# Altium PCB PowerSupplyV2.PcbDoc (part 3 of 4)
Units mm, origin at the board's own origin, x right, y up, seen from the top; angles counter-clockwise.
Board outline 28.17 x 37.01 mm, 2 copper layers (Top Layer, Bottom Layer), stack 0.971 mm thick; 117 components, 81 nets, 421 pads, 118 vias.
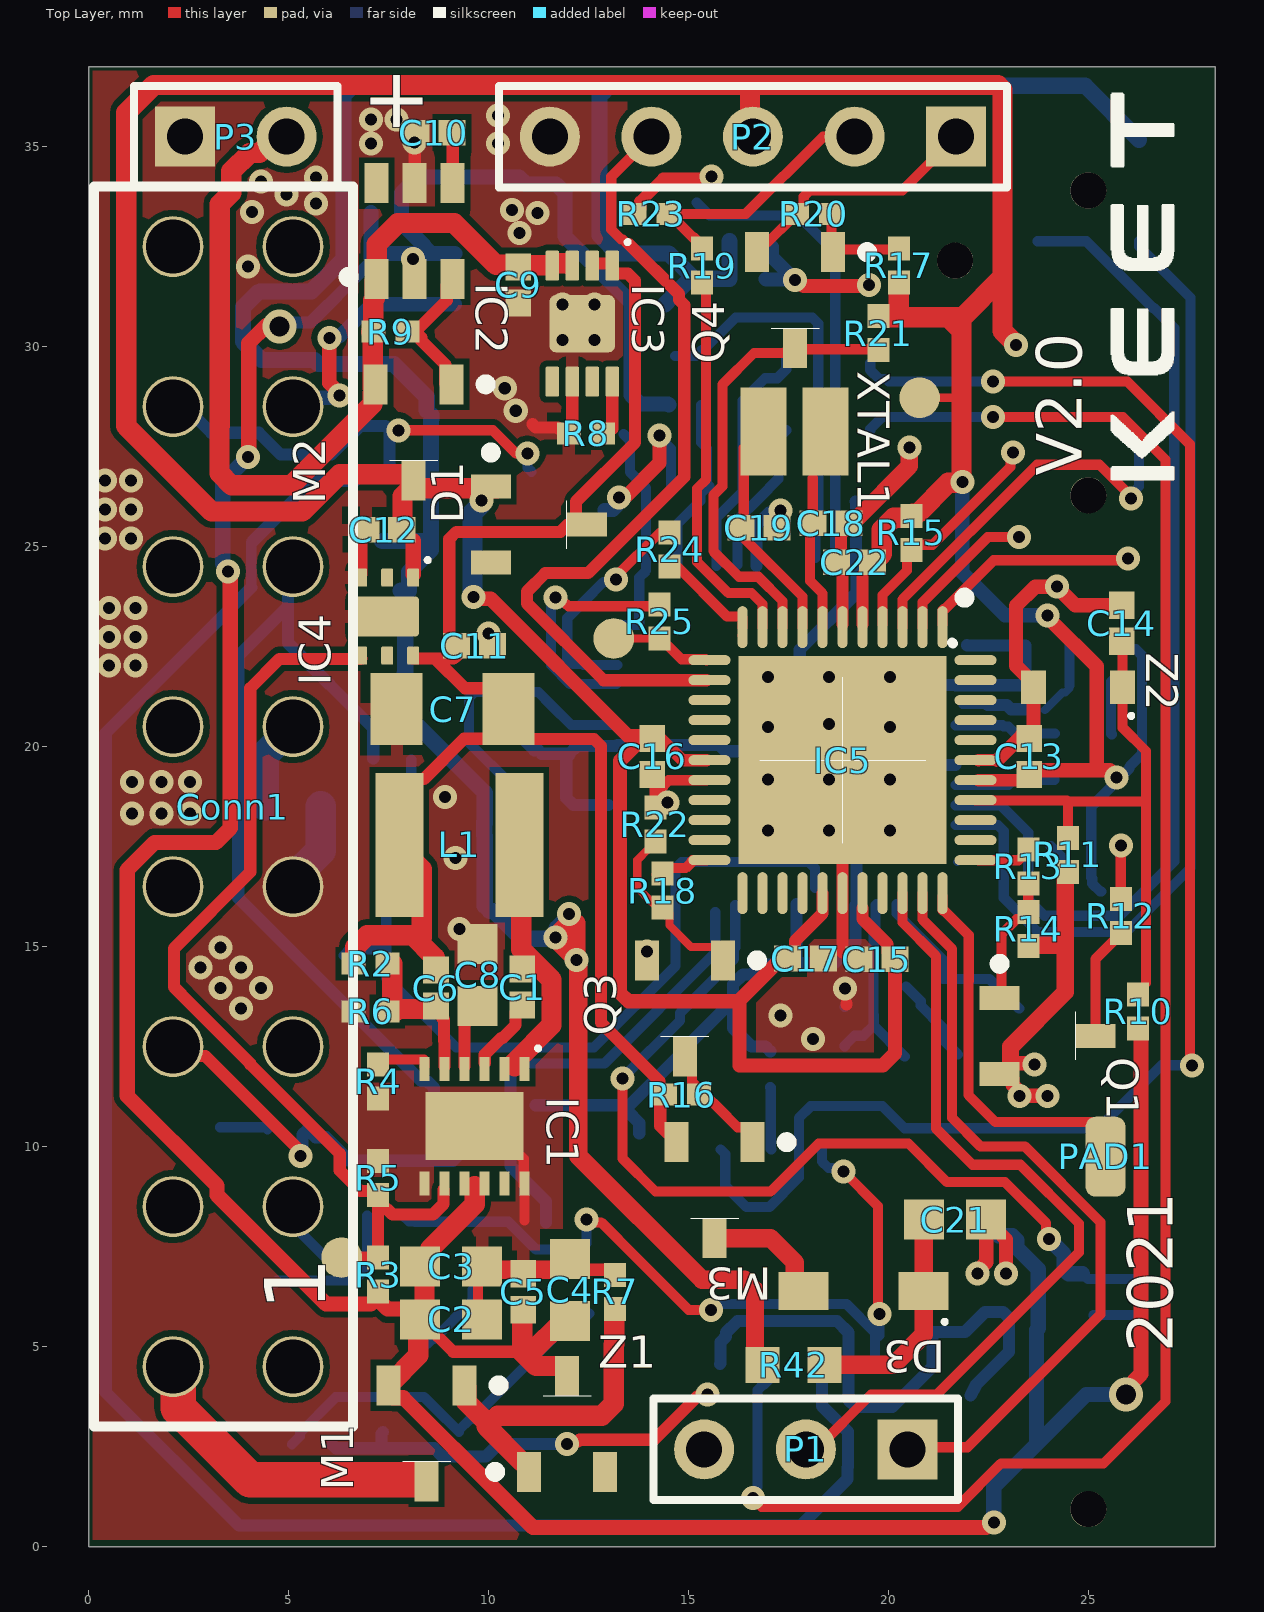
[diagram p0: Top Layer view]

## Part data (continued)
R7 R15 R37: library part CRCW0402-10K0FKED, "Res Thick Film 0402 10K Ohm 1% 1/16W ±100ppm/°C Molded SMD Paper T/R", Case Code (Imperial)=0402, Case Code (Metric)=1005, Manufacturer=Vishay, Max Operating Temperature=155°C, Max Power Dissipation=63mW, Min Operating Temperature=-55°C, Package Quantity=10, Resistance=10kR, Resistor Type="Thick Film", Supplier Part Number 1=71-CRCW0402-10K-E3, Temperature Coefficient=100ppm/°C, Tolerance=1%, Voltage Rating=50V, Case/Package=0402, Category="Chip SMD Resistors", ComponentLink1Description=https://datasheet.ciiva.com/11809/0900766b80d98824-11809984.pdf?src-supplier=RSComponents, ComponentLink1URL=https://datasheet.ciiva.com/11809/0900766b80d98824-11809984.pdf?src-supplier=RSComponents, ComponentLink2Description=https://datasheet.ciiva.com/2463/dcrcwe3-2463025.pdf?src-supplier=Digi-Key, ComponentLink2URL=https://datasheet.ciiva.com/2463/dcrcwe3-2463025.pdf?src-supplier=Digi-Key, ComponentLink3Description=https://datasheet.ciiva.com/2463/dcrcwe3-2463026.pdf?src-supplier=Digi-Key, ComponentLink3URL=https://datasheet.ciiva.com/2463/dcrcwe3-2463026.pdf?src-supplier=Digi-Key, ComponentLink4Description=https://datasheet.ciiva.com/2463/dcrcwe3-2463027.pdf?src-supplier=Digi-Key, ComponentLink4URL=https://datasheet.ciiva.com/2463/dcrcwe3-2463027.pdf?src-supplier=Digi-Key, ComponentLink5Description=https://datasheet.ciiva.com/46385/1697337-46385560.pdf?src-supplier=Element14, ComponentLink5URL=https://datasheet.ciiva.com/46385/1697337-46385560.pdf?src-supplier=Element14, ComponentLink6Description=https://datasheet.ciiva.com/3255/dcrcwe3-3255961.pdf?src-supplier=Avnet, ComponentLink6URL=https://datasheet.ciiva.com/3255/dcrcwe3-3255961.pdf?src-supplier=Avnet, ComponentLink7Description=https://datasheet.ciiva.com/3255/dcrcwe3-3255962.pdf?src-supplier=Avnet, ComponentLink7URL=https://datasheet.ciiva.com/3255/dcrcwe3-3255962.pdf?src-supplier=Avnet, ComponentLink8Description=https://datasheet.ciiva.com/5547/dcrcwe3-109170-5547786.pdf?src-supplier=Mouser, ComponentLink8URL=https://datasheet.ciiva.com/5547/dcrcwe3-109170-5547786.pdf?src-supplier=Mouser, ComponentLink9Description=https://datasheet.ciiva.com/26316/fld-crcw-e3-data-en-26316618.pdf?src-supplier=Distrelec, ComponentLink9URL=https://datasheet.ciiva.com/26316/fld-crcw-e3-data-en-26316618.pdf?src-supplier=Distrelec, ComponentLink10Description=https://datasheet.ciiva.com/16208/dcrcwe3-16208525.pdf?src-supplier=Future+Electronics, ComponentLink10URL=https://datasheet.ciiva.com/16208/dcrcwe3-16208525.pdf?src-supplier=Future+Electronics, ComponentLink11Description=https://datasheet.ciiva.com/36856/1720486-36856909.pdf?src-supplier=Element14, ComponentLink11URL=https://datasheet.ciiva.com/36856/1720486-36856909.pdf?src-supplier=Element14, Contact Plating=Tin, Depth=0.5mm, Features="Automotive AEC-Q200", Height=0.35mm, Lead Free="Lead Free", Length=1mm, Manufacturer Part Number=CRCW0402-10K0FKED, Military Standard=Not, Mount="Surface Mount", Number of Pins=2, Number of Terminations=2, Packaging="Tape and Reel", Power Rating=63mW, Pricing 1="1=0,100000, 10=0,033000, 50=0,033000, 100=0,014000, 1000=0,006000, 10000=0,005000 (USD)", Radiation Hardening=No, REACH SVHC=Unknown, RoHS=Yes, Stock 1=1711719, Supplier 1=Mouser, Termination=SMD/SMT, Voltage Rating (DC)=50V, Weight=2.3E-05oz, Width=0.02inch
R8: library part CRCW040218K0FKED, "RESISTOR, 0402, 18K, 1%, FULL REEL; Product Range:VISHAY - AEC-Q200 CRCW Series; Resistance:18kohm; Power Rating:63mW; Resistance Tolerance:± 1%; Resistor Case Style:0402 [1005 Metric]; Resistor Element Material:Thick Film; ;RoHS Compliant: Yes", Case Code (Imperial)=0402, Case Code (Metric)=1005, Manufacturer=Vishay, Max Operating Temperature=155°C, Max Power Dissipation=63mW, Min Operating Temperature=-55°C, Package Quantity=10000, Resistance=18kR, Resistance Tolerance=1%, Resistor Type="Thick Film", Supplier Part Number 1=71-CRCW0402-18K-E3, Temperature Coefficient=100ppm/°C, Voltage Rating=50V, Case/Package=0402, Category="Chip SMD Resistors", ComponentLink1Description=https://datasheet.ciiva.com/11818/0900766b80d98824-11818010.pdf?src-supplier=RSComponents, ComponentLink1URL=https://datasheet.ciiva.com/11818/0900766b80d98824-11818010.pdf?src-supplier=RSComponents, ComponentLink2Description=https://datasheet.ciiva.com/16881/dcrcwe3-16881016.pdf?src-supplier=Avnet+Europe, ComponentLink2URL=https://datasheet.ciiva.com/16881/dcrcwe3-16881016.pdf?src-supplier=Avnet+Europe, ComponentLink3Description=https://datasheet.ciiva.com/22708/1697337-22708409.pdf?src-supplier=Element14, ComponentLink3URL=https://datasheet.ciiva.com/22708/1697337-22708409.pdf?src-supplier=Element14, ComponentLink4Description=https://datasheet.ciiva.com/7841/1697337-7841482.pdf?src-supplier=Element14, ComponentLink4URL=https://datasheet.ciiva.com/7841/1697337-7841482.pdf?src-supplier=Element14, ComponentLink5Description=https://datasheet.ciiva.com/7841/1697337-7841483.pdf?src-supplier=Element14, ComponentLink5URL=https://datasheet.ciiva.com/7841/1697337-7841483.pdf?src-supplier=Element14, ComponentLink6Description=https://datasheet.ciiva.com/16773/70201119-16773931.pdf?src-supplier=Allied+Electronics, ComponentLink6URL=https://datasheet.ciiva.com/16773/70201119-16773931.pdf?src-supplier=Allied+Electronics, ComponentLink7Description=https://datasheet.ciiva.com/7743/125364-7743469.pdf?src-supplier=Element14, ComponentLink7URL=https://datasheet.ciiva.com/7743/125364-7743469.pdf?src-supplier=Element14, ComponentLink8Description=https://datasheet.ciiva.com/26316/fld-crcw-e3-data-en-26316621.pdf?src-supplier=Distrelec, ComponentLink8URL=https://datasheet.ciiva.com/26316/fld-crcw-e3-data-en-26316621.pdf?src-supplier=Distrelec, Construction=Rectangular, Contact Plating=Tin, Depth=0.5mm, Features="Automotive AEC-Q200", Height=0.35mm, Lead Free="Lead Free", Length=1mm, Manufacturer Part Number=CRCW040218K0FKED, Military Standard=Not, Number of Pins=2, Number of Terminations=2, Packaging="Tape and Reel", Power Rating=63mW, Pricing 1="1=0,10000, 10=0,03300, 50=0,03300, 100=0,01400, 1000=0,00500, 10000=0,00500 (USD)", Radiation Hardening=No, REACH SVHC=Unknown, RoHS=Yes, RoHS Compliant=Yes, Series=CRCW, Size Code=0402, Stock 1=36601, Supplier 1=Mouser, Technology="THICK FILM", Termination=SMD/SMT, Tolerance=1%, Voltage Rating (DC)=50V, Weight=2.3E-05oz, Width=0.5mm
R9: library part CRCW0402100KFKED, "Res Thick Film 0402 100K Ohm 1% 1/16W 100ppm/C Molded SMD Paper T/R", Case Code (Imperial)=0402, Case Code (Metric)=1005, Manufacturer=Vishay, Max Operating Temperature=155°C, Max Power Dissipation=63mW, Min Operating Temperature=-55°C, Package Quantity=10000, Resistance=100kR, Resistance Tolerance=1%, Resistor Type="Thick Film", Supplier Part Number 1=71-CRCW0402-100K-E3, Temperature Coefficient=100ppm/°C, Voltage Rating=50V, Case/Package=0402, Category="Chip SMD Resistors", ComponentLink1Description=https://datasheet.ciiva.com/11810/0900766b80d98824-11810752.pdf?src-supplier=RSComponents, ComponentLink1URL=https://datasheet.ciiva.com/11810/0900766b80d98824-11810752.pdf?src-supplier=RSComponents, ComponentLink2Description=https://datasheet.ciiva.com/26316/fld-crcw-e3-data-en-26316630.pdf?src-supplier=Distrelec, ComponentLink2URL=https://datasheet.ciiva.com/26316/fld-crcw-e3-data-en-26316630.pdf?src-supplier=Distrelec, ComponentLink3Description=https://datasheet.ciiva.com/2463/dcrcwe3-2463064.pdf?src-supplier=Digi-Key, ComponentLink3URL=https://datasheet.ciiva.com/2463/dcrcwe3-2463064.pdf?src-supplier=Digi-Key, ComponentLink4Description=https://datasheet.ciiva.com/2463/dcrcwe3-2463065.pdf?src-supplier=Digi-Key, ComponentLink4URL=https://datasheet.ciiva.com/2463/dcrcwe3-2463065.pdf?src-supplier=Digi-Key, ComponentLink5Description=https://datasheet.ciiva.com/16776/70201119-16776281.pdf?src-supplier=Allied+Electronics, ComponentLink5URL=https://datasheet.ciiva.com/16776/70201119-16776281.pdf?src-supplier=Allied+Electronics, ComponentLink6Description=https://datasheet.ciiva.com/16941/dcrcwe3-16941129.pdf?src-supplier=Avnet+Europe, ComponentLink6URL=https://datasheet.ciiva.com/16941/dcrcwe3-16941129.pdf?src-supplier=Avnet+Europe, ComponentLink7Description=https://datasheet.ciiva.com/2463/dcrcwe3-2463066.pdf?src-supplier=Digi-Key, ComponentLink7URL=https://datasheet.ciiva.com/2463/dcrcwe3-2463066.pdf?src-supplier=Digi-Key, ComponentLink8Description=https://datasheet.ciiva.com/3255/dcrcwe3-3255947.pdf?src-supplier=Avnet, ComponentLink8URL=https://datasheet.ciiva.com/3255/dcrcwe3-3255947.pdf?src-supplier=Avnet, ComponentLink9Description=https://datasheet.ciiva.com/3255/dcrcwe3-3255948.pdf?src-supplier=Avnet, ComponentLink9URL=https://datasheet.ciiva.com/3255/dcrcwe3-3255948.pdf?src-supplier=Avnet, ComponentLink10Description=https://datasheet.ciiva.com/16208/dcrcwe3-16208508.pdf?src-supplier=Future+Electronics, ComponentLink10URL=https://datasheet.ciiva.com/16208/dcrcwe3-16208508.pdf?src-supplier=Future+Electronics, ComponentLink11Description=https://datasheet.ciiva.com/5546/dcrcwe3-109170-5546638.pdf?src-supplier=Mouser, ComponentLink11URL=https://datasheet.ciiva.com/5546/dcrcwe3-109170-5546638.pdf?src-supplier=Mouser, ComponentLink12Description=https://datasheet.ciiva.com/46441/1720486-46441598.pdf?src-supplier=Element14, ComponentLink12URL=https://datasheet.ciiva.com/46441/1720486-46441598.pdf?src-supplier=Element14, Construction=Rectangular, Contact Plating=Tin, Depth=0.5mm, Features="Automotive AEC-Q200", Height=0.35mm, Lead Free="Lead Free", Length=1mm, Manufacturer Part Number=CRCW0402100KFKED, Military Standard=Not, Mount="Surface Mount", Number of Pins=2, Number of Terminations=2, Packaging="Tape and Reel", Power Rating=63mW, Pricing 1="1=0,10000, 10=0,03300, 50=0,03300, 100=0,01400, 1000=0,00600, 10000=0,00500 (USD)", Radiation Hardening=No, REACH SVHC=Unknown, RoHS=Yes, RoHS Compliant=Yes, Series=CRCW, Size Code=0402, Stock 1=350931, Supplier 1=Mouser, Technology="THICK FILM", Termination=SMD/SMT, Tolerance=1%, Voltage Rating (DC)=50V, Weight=2.3E-05oz, Width=0.02inch
R10: library part ERJ2RKD1203X, "Res Thick Film 0402 120K Ohm 0.5% 0.063W(1/16W) ±100ppm/C Molded SMD Automotive Punched T/R", Case Code (Imperial)=0402, Case Code (Metric)=1005, Manufacturer=Panasonic, Max Operating Temperature=125°C, Min Operating Temperature=-55°C, Power Rating=63mW, Resistance=120kR, Resistance Tolerance=0.5%, Resistor Type="Thick Film", Supplier Part Number 1=667-ERJ-2RKD1203X, Temperature Coefficient=100ppm/°C, Voltage Rating=50V, Case/Package=0402, Category="Chip SMD Resistors", ComponentLink1Description=https://datasheet.ciiva.com/9186/aoa0000ce2-9186232.pdf?src-supplier=Avnet, ComponentLink1URL=https://datasheet.ciiva.com/9186/aoa0000ce2-9186232.pdf?src-supplier=Avnet, ComponentLink2Description=https://datasheet.ciiva.com/28675/1678782-28675655.pdf?src-supplier=Element14, ComponentLink2URL=https://datasheet.ciiva.com/28675/1678782-28675655.pdf?src-supplier=Element14, Construction=Rectangular, Contact Plating=Tin, Depth=0.5mm, Height=0.35mm, Length=1mm, Manufacturer Part Number=ERJ2RKD1203X, Military Standard=Not, Mount="Surface Mount", Packaging="Cut Tape", Pricing 1="1=0,14000, 10=0,07200, 50=0,07200, 100=0,04100, 1000=0,02300, 10000=0,01600 (USD)", REACH SVHC="No SVHC", RoHS=Yes, RoHS Compliant=Yes, Stock 1=15368, Supplier 1=Mouser, Technology="THICK FILM", Termination=Solder, Tolerance=0.5%, Voltage Rating (DC)=50V
R11: library part ERJ2RHD3902X, "Res Thick Film 0402 39K Ohm 0.5% 0.063W(1/16W) ±50ppm/C Molded SMD Automotive Punched T/R", Case Code (Imperial)=0402, Case Code (Metric)=1005, Manufacturer=Panasonic, Max Operating Temperature=155°C, Min Operating Temperature=-55°C, Power Rating=63mW, Resistance=39kR, Resistor Type="Thick Film", Supplier Part Number 1=667-ERJ-2RHD3902X, Temperature Coefficient=50ppm/°C, Tolerance=0.5%, Voltage Rating=50V, Case/Package=0402, Category="Chip SMD Resistors", ComponentLink1Description=http://www.alliedelec.com/m/d/623f45ff1957d936ff56d46fd1c28cac.pdf?src-supplier=Allied+Electronics, ComponentLink1URL=http://www.alliedelec.com/m/d/623f45ff1957d936ff56d46fd1c28cac.pdf?src-supplier=Allied+Electronics, ComponentLink2Description=http://components.arrow.com/part/dataview/0323_02919458?src-supplier=Arrow+Europe, ComponentLink2URL=http://components.arrow.com/part/dataview/0323_02919458?src-supplier=Arrow+Europe, ComponentLink3Description=http://www.farnell.com/datasheets/1911175.pdf?src-supplier=Farnell, ComponentLink3URL=http://www.farnell.com/datasheets/1911175.pdf?src-supplier=Farnell, ComponentLink4Description=http://www.farnell.com/datasheets/1678782.pdf?src-supplier=Element14, ComponentLink4URL=http://www.farnell.com/datasheets/1678782.pdf?src-supplier=Element14, ComponentLink5Description=http://www.farnell.com/datasheets/1911175.pdf?src-supplier=Element14, ComponentLink5URL=http://www.farnell.com/datasheets/1911175.pdf?src-supplier=Element14, Depth=0.5mm, Height=0.35mm, Length=1mm, Manufacturer Part Number=ERJ2RHD3902X, Military Standard=Not, Mount="Surface Mount", Packaging="Cut Tape", Pricing 1="1=0,10000, 10=0,04900, 50=0,04900, 100=0,02700, 1000=0,01600, 10000=0,01100 (USD)", REACH SVHC="No SVHC", RoHS=Yes, RoHS Compliant=Yes, Stock 1=27224, Supplier 1=Mouser, Termination=Solder, Voltage Rating (DC)=50V
R12: library part ERJ-2RKF1500X, "RES SMD 150 OHM 1% 1/10W 0402", Case Code (Imperial)=0402, Case Code (Metric)=1005, Manufacturer=Panasonic, Max Operating Temperature=155°C, Max Power Dissipation=100mW, Min Operating Temperature=-55°C, Package Quantity=1, Resistance=150R, Resistance Tolerance=1%, Resistor Type="Thick Film", Supplier Part Number 1=667-ERJ-2RKF1500X, Temperature Coefficient=100ppm/°C, Voltage Rating=50V, Case/Package=0402, Category="Chip SMD Resistors", ComponentLink1Description=https://datasheet.ciiva.com/34303/1987126-34303555.pdf?src-supplier=Jameco, ComponentLink1URL=https://datasheet.ciiva.com/34303/1987126-34303555.pdf?src-supplier=Jameco, ComponentLink2Description=https://datasheet.ciiva.com/11821/0900766b80f80784-11821183.pdf?src-supplier=RSComponents, ComponentLink2URL=https://datasheet.ciiva.com/11821/0900766b80f80784-11821183.pdf?src-supplier=RSComponents, ComponentLink3Description=https://datasheet.ciiva.com/16774/70260748-16774549.pdf?src-supplier=Allied+Electronics, ComponentLink3URL=https://datasheet.ciiva.com/16774/70260748-16774549.pdf?src-supplier=Allied+Electronics, ComponentLink4Description=https://datasheet.ciiva.com/43467/1678782-43467237.pdf?src-supplier=Farnell, ComponentLink4URL=https://datasheet.ciiva.com/43467/1678782-43467237.pdf?src-supplier=Farnell, ComponentLink5Description=https://datasheet.ciiva.com/7887/426256-7887016.pdf?src-supplier=Element14, ComponentLink5URL=https://datasheet.ciiva.com/7887/426256-7887016.pdf?src-supplier=Element14, ComponentLink6Description=https://datasheet.ciiva.com/16371/aoa0000ce2-16371497.pdf?src-supplier=Future+Electronics, ComponentLink6URL=https://datasheet.ciiva.com/16371/aoa0000ce2-16371497.pdf?src-supplier=Future+Electronics, ComponentLink7Description=https://datasheet.ciiva.com/7886/aoa0000ce2-7886714.pdf?src-supplier=Element14, ComponentLink7URL=https://datasheet.ciiva.com/7886/aoa0000ce2-7886714.pdf?src-supplier=Element14, ComponentLink8Description=https://datasheet.ciiva.com/46373/1678782-46373162.pdf?src-supplier=Element14, ComponentLink8URL=https://datasheet.ciiva.com/46373/1678782-46373162.pdf?src-supplier=Element14, ComponentLink9Description=https://datasheet.ciiva.com/46373/1678782-46373163.pdf?src-supplier=Element14, ComponentLink9URL=https://datasheet.ciiva.com/46373/1678782-46373163.pdf?src-supplier=Element14, ComponentLink10Description=https://datasheet.ciiva.com/16770/70260748-16770572.pdf?src-supplier=Allied+Electronics, ComponentLink10URL=https://datasheet.ciiva.com/16770/70260748-16770572.pdf?src-supplier=Allied+Electronics, ComponentLink11Description=https://datasheet.ciiva.com/17207/aoa0000ce2-17207389.pdf?src-supplier=Avnet+Europe, ComponentLink11URL=https://datasheet.ciiva.com/17207/aoa0000ce2-17207389.pdf?src-supplier=Avnet+Europe, ComponentLink12Description=https://datasheet.ciiva.com/28568/1678782-28568846.pdf?src-supplier=Element14, ComponentLink12URL=https://datasheet.ciiva.com/28568/1678782-28568846.pdf?src-supplier=Element14, ComponentLink13Description=https://datasheet.ciiva.com/30106/aoa0000ce2-30106926.pdf?src-supplier=Onlinecomponents.com, ComponentLink13URL=https://datasheet.ciiva.com/30106/aoa0000ce2-30106926.pdf?src-supplier=Onlinecomponents.com, ComponentLink14Description=https://datasheet.ciiva.com/22673/1678782-22673679.pdf?src-supplier=Element14, ComponentLink14URL=https://datasheet.ciiva.com/22673/1678782-22673679.pdf?src-supplier=Element14, Construction=Rectangular, Contact Plating=Tin, Depth=0.5mm, Features="Automotive AEC-Q200", Height=0.35mm, Lead Free="Lead Free", Length=1mm, Manufacturer Part Number=ERJ-2RKF1500X, Military Standard=Not, Mount="Surface Mount", Number of Pins=2, Number of Terminations=2, Packaging="Tape and Reel", Power Rating=100mW, Pricing 1="1=0,10000, 10=0,02200, 50=0,02200, 100=0,00900, 1000=0,00400, 10000=0,00300 (USD)", Radiation Hardening=No, REACH SVHC="No SVHC", RoHS=Yes, RoHS Compliant=Yes, Series=ERJ, Size Code=0402, Stock 1=497660, Supplier 1=Mouser, Technology="THICK FILM", Termination=SMD/SMT, Tolerance=1%, Voltage Rating (DC)=50V, Width=0.02inch
R13 R17 R18 R21: library part ERJ-2RKF4701X, "Res Thick Film 0402 4.7K Ohm 1% 1/10W Â±100ppm/Â°C Molded SMD SMD Punched Carrier T/R", Case Code (Imperial)=0402, Case Code (Metric)=1005, Manufacturer=Panasonic, Max Operating Temperature=155°C, Max Power Dissipation=100mW, Min Operating Temperature=-55°C, Package Quantity=10000, Resistance=4.7kR, Resistor Type="Thick Film", Supplier Part Number 1=667-ERJ-2RKF4701X, Temperature Coefficient=100ppm/°C, Tolerance=1%, Voltage Rating=50V, Case/Package=0402, Category="Chip SMD Resistors", ComponentLink1Description=https://datasheet.ciiva.com/11821/0900766b80f80784-11821329.pdf?src-supplier=RSComponents, ComponentLink1URL=https://datasheet.ciiva.com/11821/0900766b80f80784-11821329.pdf?src-supplier=RSComponents, ComponentLink2Description=https://datasheet.ciiva.com/30053/aoa0000ce2-30053990.pdf?src-supplier=Onlinecomponents.com, ComponentLink2URL=https://datasheet.ciiva.com/30053/aoa0000ce2-30053990.pdf?src-supplier=Onlinecomponents.com, ComponentLink3Description=https://datasheet.ciiva.com/7830/aoa0000ce2-7830727.pdf?src-supplier=Element14, ComponentLink3URL=https://datasheet.ciiva.com/7830/aoa0000ce2-7830727.pdf?src-supplier=Element14, ComponentLink4Description=https://datasheet.ciiva.com/22781/1678782-22781576.pdf?src-supplier=Farnell, ComponentLink4URL=https://datasheet.ciiva.com/22781/1678782-22781576.pdf?src-supplier=Farnell, ComponentLink5Description=https://datasheet.ciiva.com/9195/aoa0000ce2-9195737.pdf?src-supplier=Avnet, ComponentLink5URL=https://datasheet.ciiva.com/9195/aoa0000ce2-9195737.pdf?src-supplier=Avnet, ComponentLink6Description=https://datasheet.ciiva.com/17213/aoa0000ce2-17213180.pdf?src-supplier=Avnet+Europe, ComponentLink6URL=https://datasheet.ciiva.com/17213/aoa0000ce2-17213180.pdf?src-supplier=Avnet+Europe, ComponentLink7Description=https://datasheet.ciiva.com/22667/1678782-22667886.pdf?src-supplier=Element14, ComponentLink7URL=https://datasheet.ciiva.com/22667/1678782-22667886.pdf?src-supplier=Element14, ComponentLink8Description=https://datasheet.ciiva.com/16763/70260748-16763151.pdf?src-supplier=Allied+Electronics, ComponentLink8URL=https://datasheet.ciiva.com/16763/70260748-16763151.pdf?src-supplier=Allied+Electronics, ComponentLink9Description=https://datasheet.ciiva.com/22723/1678782-22723903.pdf?src-supplier=Element14, ComponentLink9URL=https://datasheet.ciiva.com/22723/1678782-22723903.pdf?src-supplier=Element14, ComponentLink10Description=https://datasheet.ciiva.com/24025/aoa0000ce2-24025663.pdf?src-supplier=Mouser, ComponentLink10URL=https://datasheet.ciiva.com/24025/aoa0000ce2-24025663.pdf?src-supplier=Mouser, Contact Plating=Tin, Depth=0.5mm, Features="Automotive AEC-Q200", Height=0.35mm, Lead Free="Lead Free", Length=1mm, Manufacturer Part Number=ERJ-2RKF4701X, Military Standard=Not, Mount="Surface Mount", Number of Pins=2, Number of Terminations=2, Packaging="Cut Tape", Power Rating=100mW, Pricing 1="1=0,10000, 10=0,02200, 50=0,02200, 100=0,00900, 1000=0,00400, 10000=0,00300 (USD)", Radiation Hardening=No, REACH SVHC="No SVHC", RoHS=Yes, RoHS Compliant=Yes, Series=ERJ-2Rx, Stock 1=689601, Supplier 1=Mouser, Technology="THICK FILM", Termination=SMD/SMT, Voltage Rating (DC)=50V, Weight=0.000388oz, Width=0.5mm
R14 R16 R20 R22 R35: library part CRCW040247K0FKED, "Resistor;  Thick Film;  47 Kilohms;  0.063 W;  1%;  SMT;  0402;  TCR 37 ppm/DegC", Case Code (Imperial)=0402, Case Code (Metric)=1005, Manufacturer=Vishay, Max Operating Temperature=155°C, Max Power Dissipation=63mW, Min Operating Temperature=-55°C, Package Quantity=10000, Resistance=47kR, Resistance Tolerance=1%, Resistor Type="Thick Film", Supplier Part Number 1=71-CRCW0402-47K-E3, Temperature Coefficient=100ppm/°C, Voltage Rating=50V, Case/Package=0402, Category="Chip SMD Resistors", ComponentLink1Description=https://datasheet.ciiva.com/11808/0900766b80d98824-11808993.pdf?src-supplier=RSComponents, ComponentLink1URL=https://datasheet.ciiva.com/11808/0900766b80d98824-11808993.pdf?src-supplier=RSComponents, ComponentLink2Description=https://datasheet.ciiva.com/5543/dcrcwe3-109170-5543015.pdf?src-supplier=Mouser, ComponentLink2URL=https://datasheet.ciiva.com/5543/dcrcwe3-109170-5543015.pdf?src-supplier=Mouser, ComponentLink3Description=https://datasheet.ciiva.com/16768/70201119-16768855.pdf?src-supplier=Allied+Electronics, ComponentLink3URL=https://datasheet.ciiva.com/16768/70201119-16768855.pdf?src-supplier=Allied+Electronics, ComponentLink4Description=https://datasheet.ciiva.com/7777/1720486-7777545.pdf?src-supplier=Element14, ComponentLink4URL=https://datasheet.ciiva.com/7777/1720486-7777545.pdf?src-supplier=Element14, ComponentLink5Description=https://datasheet.ciiva.com/3256/dcrcwe3-3256558.pdf?src-supplier=Avnet, ComponentLink5URL=https://datasheet.ciiva.com/3256/dcrcwe3-3256558.pdf?src-supplier=Avnet, ComponentLink6Description=https://datasheet.ciiva.com/3256/dcrcwe3-3256559.pdf?src-supplier=Avnet, ComponentLink6URL=https://datasheet.ciiva.com/3256/dcrcwe3-3256559.pdf?src-supplier=Avnet, ComponentLink7Description=https://datasheet.ciiva.com/7777/1697337-7777247.pdf?src-supplier=Element14, ComponentLink7URL=https://datasheet.ciiva.com/7777/1697337-7777247.pdf?src-supplier=Element14, Construction=Rectangular, Contact Plating=Tin, Depth=0.5mm, Features="Automotive AEC-Q200", Height=0.35mm, Lead Free="Lead Free", Length=1mm, Manufacturer Part Number=CRCW040247K0FKED, Military Standard=Not, Mount="Surface Mount", Number of Terminations=2, Packaging="Tape and Reel", Power Rating=63mW, Pricing 1="1=0,10000, 10=0,03300, 50=0,03300, 100=0,01400, 1000=0,00500, 10000=0,00500 (USD)", Radiation Hardening=No, REACH SVHC=Unknown, RoHS=Yes, RoHS Compliant=Yes, Series=CRCW, Stock 1=40176, Supplier 1=Mouser, Technology="THICK FILM", Termination=SMD/SMT, Tolerance=1%, Voltage Rating (DC)=50V, Weight=2.3E-05oz, Width=0.5mm, Working Voltage=50V
R19: library part RC0402FR-072K4L, "Res Thick Film 0402 2.4K Ohm 1% 0.063W(1/16W) ±100ppm/C Epoxy Pad SMD T/R", Case Code (Imperial)=0402, Case Code (Metric)=1005, Manufacturer=Yageo, Max Operating Temperature=155°C, Max Power Dissipation=63mW, Min Operating Temperature=-55°C, Package Quantity=1, Resistance=2.4kR, Resistance Tolerance=1%, Resistor Type="Thick Film", Supplier Part Number 1=603-RC0402FR-072K4L, Temperature Coefficient=100ppm/°C, Voltage Rating=50V, Case/Package=0402, Category="Chip SMD Resistors", ComponentLink1Description=https://datasheet.ciiva.com/2453/pyu-r-int-thick-7-2453427.pdf?src-supplier=Digi-Key, ComponentLink1URL=https://datasheet.ciiva.com/2453/pyu-r-int-thick-7-2453427.pdf?src-supplier=Digi-Key, ComponentLink2Description=https://datasheet.ciiva.com/2453/pyu-r-int-thick-7-2453428.pdf?src-supplier=Digi-Key, ComponentLink2URL=https://datasheet.ciiva.com/2453/pyu-r-int-thick-7-2453428.pdf?src-supplier=Digi-Key, ComponentLink3Description=https://datasheet.ciiva.com/2453/pyu-r-int-thick-7-2453429.pdf?src-supplier=Digi-Key, ComponentLink3URL=https://datasheet.ciiva.com/2453/pyu-r-int-thick-7-2453429.pdf?src-supplier=Digi-Key, ComponentLink4Description=https://datasheet.ciiva.com/7849/1018594-7849930.pdf?src-supplier=Element14, ComponentLink4URL=https://datasheet.ciiva.com/7849/1018594-7849930.pdf?src-supplier=Element14, ComponentLink5Description=https://datasheet.ciiva.com/7849/1018594-7849931.pdf?src-supplier=Element14, ComponentLink5URL=https://datasheet.ciiva.com/7849/1018594-7849931.pdf?src-supplier=Element14, ComponentLink6Description=https://datasheet.ciiva.com/17423/pyu-rc0402-51-rohs-l-6-r-17423915.pdf?src-supplier=Future+Electronics, ComponentLink6URL=https://datasheet.ciiva.com/17423/pyu-rc0402-51-rohs-l-6-r-17423915.pdf?src-supplier=Future+Electronics, ComponentLink7Description=https://datasheet.ciiva.com/12667/pyu-rc0402-51-rohs-l-6-r-12667437.pdf?src-supplier=Mouser, ComponentLink7URL=https://datasheet.ciiva.com/12667/pyu-rc0402-51-rohs-l-6-r-12667437.pdf?src-supplier=Mouser, Construction=Rectangular, Depth=0.5mm, Features="Moisture Resistant", Height=0.016inch, Lead Free="Lead Free", Length=1mm, Manufacturer Part Number=RC0402FR-072K4L, Military Standard=Not, Number of Terminations=2, Packaging="Tape and Reel", Power Rating=63mW, Pricing 1="1=0,10000, 10=0,01200, 50=0,01200, 100=0,00400, 1000=0,00400, 10000=0,00300 (USD)", REACH SVHC=Unknown, RoHS=Yes, RoHS Compliant=Yes, Series=RC, Size Code=0402, Stock 1=2143, Supplier 1=Mouser, Termination=SMD/SMT, Tolerance=1%, Voltage Rating (DC)=50V, Width=0.02inch
R23: library part CRG0402F5K6, "TE Connectivity CRG0402 Series Thick Film Surface Mount Resistor 0402 Case 5.6k 1% 0.063W 100ppm/C", Case Code (Imperial)=0402, Case Code (Metric)=1005, Manufacturer="TE Connectivity", Max Operating Temperature=125°C, Min Operating Temperature=-55°C, Number of Resistors=1, Package Quantity=10000, Power Rating=63mW, Resistance=5.6kR, Resistor Type="Thick Film", Supplier Part Number 1=279-CRG0402F5K6, Temperature Coefficient=100ppm/°C, Tolerance=1%, Voltage Rating=50V, Case/Package=0402, Category="Chip SMD Resistors", ComponentLink1Description=https://datasheet.ciiva.com/11811/0900766b80d0914d-11811373.pdf?src-supplier=RSComponents, ComponentLink1URL=https://datasheet.ciiva.com/11811/0900766b80d0914d-11811373.pdf?src-supplier=RSComponents, ComponentLink2Description=https://datasheet.ciiva.com/46386/1610603-46386187.pdf?src-supplier=Element14, ComponentLink2URL=https://datasheet.ciiva.com/46386/1610603-46386187.pdf?src-supplier=Element14, ComponentLink3Description=https://datasheet.ciiva.com/22706/1610603-22706136.pdf?src-supplier=Element14, ComponentLink3URL=https://datasheet.ciiva.com/22706/1610603-22706136.pdf?src-supplier=Element14, Depth=0.5mm, ELV=Compliant, Height=0.35mm, Length=1mm, Manufacturer Part Number=CRG0402F5K6, Mount="Surface Mount", Number of Terminations=2, Packaging="Tape and Reel", Pricing 1="10000=0,00200 (USD)", REACH SVHC="No SVHC", RoHS=Yes, Supplier 1=Mouser, Termination=Solder, Voltage Rating (DC)=50V, Weight=2.3E-05oz, Width=0.5mm
R24 R25: library part RC0402FR-132K2L, "Thick Film Resistors - SMD 2.2K OHM 1%", Case Code (Imperial)=0402, Case Code (Metric)=1005, Manufacturer=Yageo, Max Operating Temperature=155°C, Min Operating Temperature=-55°C, Power Rating=62.5mW, Resistance=2.2kR, Resistor Type="Thick Film", Supplier Part Number 1=603-RC0402FR-132K2L, Temperature Coefficient=100ppm/°C, Tolerance=1%, Voltage Rating=50V, Case/Package=0402, Category="Chip SMD Resistors", ComponentLink1Description=https://datasheet.ciiva.com/8894/pyu-rc0402-51-rohs-l-6-8894632.pdf?src-supplier=Avnet, ComponentLink1URL=https://datasheet.ciiva.com/8894/pyu-rc0402-51-rohs-l-6-8894632.pdf?src-supplier=Avnet, ComponentLink2Description=https://datasheet.ciiva.com/16865/pyu-rc0402-51-rohs-l-6-16865051.pdf?src-supplier=Avnet+Europe, ComponentLink2URL=https://datasheet.ciiva.com/16865/pyu-rc0402-51-rohs-l-6-16865051.pdf?src-supplier=Avnet+Europe, ComponentLink3Description=https://datasheet.ciiva.com/12575/pyu-rc0402-51-rohs-l-6-r-8721-12575132.pdf?src-supplier=Mouser, ComponentLink3URL=https://datasheet.ciiva.com/12575/pyu-rc0402-51-rohs-l-6-r-8721-12575132.pdf?src-supplier=Mouser, Construction=Rectangular, Contact Plating=Tin,Matte, Depth=0.5mm, Height=0.35mm, Length=1mm, Manufacturer Part Number=RC0402FR-132K2L, Military Standard=Not, Packaging="Tape and Reel", Pricing 1="1=0,10000, 10=0,01200, 50=0,01200, 100=0,00400, 1000=0,00400, 10000=0,00400 (USD)", Radiation Hardening=No, RoHS=Yes, RoHS Compliant=Yes, Series=RC, Stock 1=99082, Supplier 1=Mouser, Termination=SMD/SMT, Width=0.5mm
R26 R27: library part ERJ-2RKF3301X, "PANASONIC - ERJ2RKF3301X - RES, 3K3, 1%, 0.1W, 0402, THICK FILM", Case Code (Imperial)=0402, Case Code (Metric)=1005, Manufacturer=Panasonic, Max Operating Temperature=155°C, Max Power Dissipation=100mW, Min Operating Temperature=-55°C, Package Quantity=1, Resistance=3.3kR, Resistor Type="Thick Film", Supplier Part Number 1=667-ERJ-2RKF3301X, Temperature Coefficient=100ppm/°C, Tolerance=1%, Voltage Rating=50V, Case/Package=0402, Category="Chip SMD Resistors", ComponentLink1Description=https://datasheet.ciiva.com/11821/0900766b80f80784-11821314.pdf?src-supplier=RSComponents, ComponentLink1URL=https://datasheet.ciiva.com/11821/0900766b80f80784-11821314.pdf?src-supplier=RSComponents, ComponentLink2Description=https://datasheet.ciiva.com/22687/1678782-22687445.pdf?src-supplier=Element14, ComponentLink2URL=https://datasheet.ciiva.com/22687/1678782-22687445.pdf?src-supplier=Element14, ComponentLink3Description=https://datasheet.ciiva.com/7802/aoa0000ce2-7802408.pdf?src-supplier=Element14, ComponentLink3URL=https://datasheet.ciiva.com/7802/aoa0000ce2-7802408.pdf?src-supplier=Element14, ComponentLink4Description=https://datasheet.ciiva.com/16777/70260748-16777945.pdf?src-supplier=Allied+Electronics, ComponentLink4URL=https://datasheet.ciiva.com/16777/70260748-16777945.pdf?src-supplier=Allied+Electronics, ComponentLink5Description=https://datasheet.ciiva.com/46372/1678782-46372730.pdf?src-supplier=Element14, ComponentLink5URL=https://datasheet.ciiva.com/46372/1678782-46372730.pdf?src-supplier=Element14, ComponentLink6Description=https://datasheet.ciiva.com/22667/1678782-22667883.pdf?src-supplier=Element14, ComponentLink6URL=https://datasheet.ciiva.com/22667/1678782-22667883.pdf?src-supplier=Element14, ComponentLink7Description=https://datasheet.ciiva.com/46372/1678782-46372731.pdf?src-supplier=Element14, ComponentLink7URL=https://datasheet.ciiva.com/46372/1678782-46372731.pdf?src-supplier=Element14, ComponentLink8Description=https://datasheet.ciiva.com/6138/aoa0000ce2-6138172.pdf?src-supplier=Farnell, ComponentLink8URL=https://datasheet.ciiva.com/6138/aoa0000ce2-6138172.pdf?src-supplier=Farnell, ComponentLink9Description=https://datasheet.ciiva.com/16773/70260748-16773756.pdf?src-supplier=Allied+Electronics, ComponentLink9URL=https://datasheet.ciiva.com/16773/70260748-16773756.pdf?src-supplier=Allied+Electronics, ComponentLink10Description=https://datasheet.ciiva.com/43467/1678782-43467358.pdf?src-supplier=Farnell, ComponentLink10URL=https://datasheet.ciiva.com/43467/1678782-43467358.pdf?src-supplier=Farnell, ComponentLink11Description=https://datasheet.ciiva.com/17213/aoa0000ce2-17213727.pdf?src-supplier=Avnet+Europe, ComponentLink11URL=https://datasheet.ciiva.com/17213/aoa0000ce2-17213727.pdf?src-supplier=Avnet+Europe, ComponentLink12Description=https://datasheet.ciiva.com/30264/aoa0000ce2-30264303.pdf?src-supplier=Onlinecomponents.com, ComponentLink12URL=https://datasheet.ciiva.com/30264/aoa0000ce2-30264303.pdf?src-supplier=Onlinecomponents.com, Contact Plating=Tin, Depth=0.5mm, Features="Automotive AEC-Q200", Height=0.35mm, Lead Free="Lead Free", Length=1mm, Manufacturer Part Number=ERJ-2RKF3301X, Military Standard=Not, Mount="Surface Mount", Number of Pins=2, Number of Terminations=2, Packaging="Tape and Reel", Power Rating=100mW, Pricing 1="1=0,10000, 10=0,02200, 50=0,02200, 100=0,00900, 1000=0,00400, 10000=0,00300 (USD)", Radiation Hardening=No, REACH SVHC="No SVHC", RoHS=Yes, Stock 1=89476, Supplier 1=Mouser, Termination=SMD/SMT, Voltage Rating (DC)=50V, Width=0.02inch
R28 R29 R30 R31 R36: library part ERJ-U02F1002X, "RES, THICK FILM, 10K, 1%, 0.1W, 0402, REEL; Product Range:AEC-Q200 ERJ Series; Resistance:10kohm; Power Rating:100mW; Resistance Tolerance: 1%; Voltage Rating:50V; Resistor Case Style:0402 [1005 Metric]; Packaging:Tape & Reel; MSL:-;RoHS Compliant: Yes", Case Code (Imperial)=0402, Case Code (Metric)=1005, Current Rating=1A, Manufacturer=Panasonic, Max Operating Temperature=155°C, Min Operating Temperature=-55°C, Package Quantity=10000, Power Rating=100mW, Resistance=10kR, Resistor Type="Thick Film", Supplier Part Number 1=667-ERJ-U02F1002X, Temperature Coefficient=200ppm/°C, Tolerance=1%, Voltage Rating=50V, Case/Package=0402, Category="Chip SMD Resistors", ComponentLink1Description=https://datasheet.ciiva.com/29928/aoa0000ce5-29928150.pdf?src-supplier=Avnet, ComponentLink1URL=https://datasheet.ciiva.com/29928/aoa0000ce5-29928150.pdf?src-supplier=Avnet, ComponentLink2Description=https://datasheet.ciiva.com/28514/1783557-28514361.pdf?src-supplier=Element14, ComponentLink2URL=https://datasheet.ciiva.com/28514/1783557-28514361.pdf?src-supplier=Element14, ComponentLink3Description=https://datasheet.ciiva.com/28514/1783557-28514367.pdf?src-supplier=Element14, ComponentLink3URL=https://datasheet.ciiva.com/28514/1783557-28514367.pdf?src-supplier=Element14, Height=0.35mm, Length=1mm, Manufacturer Part Number=ERJ-U02F1002X, Mount="Surface Mount", Packaging="Tape and Reel", Pricing 1="1=0,10000, 10=0,05100, 50=0,05100, 100=0,02900, 1000=0,01600, 10000=0,01200 (USD)", Radiation Hardening=No, REACH SVHC=Unknown, RoHS=Yes, RoHS Compliant=Yes, Stock 1=30000, Supplier 1=Mouser, Termination=SMD/SMT, Voltage Rating (DC)=50V, Weight=2.8E-05oz, Width=0.5mm
R32: library part CRCW0402510RFKEDC, "Res Thick Film 0402 510 Ohm 1% 0.063W(1/16W) ±100ppm/C Pad SMD T/R", Case Code (Imperial)=0402, Case Code (Metric)=1005, Manufacturer=Vishay, Max Operating Temperature=150°C, Max Power Dissipation=250mW, Min Operating Temperature=-55°C, Resistance=510R, Resistor Type="Thick Film", Supplier Part Number 1=71-CRCW0402510RFKEDC, Temperature Coefficient=100ppm/°C, Tolerance=1%, Zener Voltage=75V, Case/Package=0402, Category="Chip SMD Resistors", ComponentLink1Description=http://www.vishay.com/docs/28773/crcwce3.pdf?src-supplier=Digi-Key, ComponentLink1URL=http://www.vishay.com/docs/28773/crcwce3.pdf?src-supplier=Digi-Key, Impedance=255R, Manufacturer Part Number=CRCW0402510RFKEDC, Mount="Surface Mount", Number of Terminations=2, Packaging="Cut Tape", Pricing 1="1=0,10000, 10=0,03200, 50=0,03200, 100=0,01300, 1000=0,00500, 10000=0,00300 (USD)", RoHS=Yes, RoHS Compliant=Yes, Stock 1=57461, Supplier 1=Mouser